# EAGLE board LED_ansteuerung (EAGLE 8.0.1)

Size 100 x 80 mm. Coordinates in mm from the lower left corner, seen from the top.
Outline: 0,0 100,0 100,80 0,80 0,0
Copper layers (1*16): Top 0.035mm / dielectric 1.5mm / Bottom 0.035mm
Design rules "default": minimum track width 10mil, minimum drill 24mil, track to track 8mil, track to pad 8mil, pad to pad 8mil, via to via 8mil, smd to smd 8mil, copper to edge 40mil, drill to drill 8mil, minimum pad ring 10mil, minimum via ring 8mil, stop-mask expansion 4mil, vias tented up to drill 0mil, thermal gap 10mil

## Footprints (pad centres in the part's own frame; a part is rotated, then mirrored left to right if it is on the bottom)
DIL16 = drill 0.813 long: 1 -8.89,-3.81; 2 -6.35,-3.81; 3 -3.81,-3.81; 4 -1.27,-3.81; 5 1.27,-3.81; 6 3.81,-3.81; 7 6.35,-3.81; 8 8.89,-3.81; 9 8.89,3.81; 10 6.35,3.81; 11 3.81,3.81; 12 1.27,3.81; 13 -1.27,3.81; 14 -3.81,3.81; 15 -6.35,3.81; 16 -8.89,3.81
SOT54A = drill 0.813 octagon: B 0,1.905; C -1.27,0; E 1.27,0
M1206 = smd 1.6 x 2: 1 -1.4,0; 2 1.4,0
1206 = smd 1.6 x 1.803: A -1.422,0; C 1.422,0

## Placement (x,y rotation side)
IC1  74595N  [DIL16]  8.89,50.8 90 top
IC2  74595N  [DIL16]  8.89,22.86 90 top
IC3  74595N  [DIL16]  26.67,73.66 0 top
IC4  74595N  [DIL16]  55.88,73.66 0 top
Q1  BC337  [SOT54A]  -85.09,41.91 0 top  (outside the outline)
Q2  BC337  [SOT54A]  -22.86,48.26 0 top  (outside the outline)
Q3  BC337  [SOT54A]  -35.56,48.26 0 top  (outside the outline)
Q4  BC337  [SOT54A]  -48.26,48.26 0 top  (outside the outline)
Q5  BC337  [SOT54A]  -60.96,48.26 0 top  (outside the outline)
Q6  BC337  [SOT54A]  -73.66,48.26 0 top  (outside the outline)
Q7  BC337  [SOT54A]  -86.36,48.26 0 top  (outside the outline)
Q8  BC337  [SOT54A]  -22.86,54.61 0 top  (outside the outline)
Q9  BC337  [SOT54A]  -35.56,54.61 0 top  (outside the outline)
Q10  BC337  [SOT54A]  -48.26,54.61 0 top  (outside the outline)
Q11  BC337  [SOT54A]  -60.96,54.61 0 top  (outside the outline)
R1  220  [M1206]  24.13,59.69 90 top
R2  220  [M1206]  29.21,59.69 90 top
R3  220  [M1206]  34.29,59.69 90 top
R4  220  [M1206]  39.37,59.69 90 top
R5  220  [M1206]  44.45,59.69 90 top
R6  220  [M1206]  49.53,59.69 90 top
R7  220  [M1206]  54.61,59.69 90 top
R8  220  [M1206]  59.69,59.69 90 top
R9  220  [M1206]  64.77,59.69 90 top
R10  220  [M1206]  69.85,59.69 90 top
R11  220  [M1206]  -15.24,41.91 0 top  (outside the outline)
R12  220  [M1206]  -20.32,41.91 0 top  (outside the outline)
V1  blue  [1206]  24.13,53.34 270 top
V2  blue  [1206]  29.21,53.34 270 top
V3  blue  [1206]  -36.83,41.91 0 top  (outside the outline)
V4  blue  [1206]  -41.91,41.91 0 top  (outside the outline)
V5  [1206]  -35.56,90.17 0 top  (outside the outline)
V6  blue  [1206]  -46.99,41.91 0 top  (outside the outline)
V7  blue  [1206]  -52.07,41.91 0 top  (outside the outline)
V8  blue  [1206]  -57.15,41.91 0 top  (outside the outline)
V9  blue  [1206]  -62.23,41.91 0 top  (outside the outline)
V10  blue  [1206]  -67.31,41.91 0 top  (outside the outline)
V11  blue  [1206]  -72.39,41.91 0 top  (outside the outline)
V12  blue  [1206]  -46.99,59.69 0 top  (outside the outline)
V13  blue  [1206]  -52.07,59.69 0 top  (outside the outline)
V14  blue  [1206]  -57.15,59.69 0 top  (outside the outline)
V15  blue  [1206]  -62.23,59.69 0 top  (outside the outline)
V16  blue  [1206]  -67.31,59.69 0 top  (outside the outline)
V17  blue  [1206]  -72.39,59.69 0 top  (outside the outline)
V18  [1206]  -77.47,59.69 0 top  (outside the outline)
V19  [1206]  -82.55,59.69 0 top  (outside the outline)
V20  [1206]  -87.63,59.69 0 top  (outside the outline)
V21  [1206]  -15.24,64.77 0 top  (outside the outline)
V22  [1206]  -20.32,64.77 0 top  (outside the outline)
V23  [1206]  -25.4,64.77 0 top  (outside the outline)
V24  [1206]  -30.48,64.77 0 top  (outside the outline)
V25  [1206]  -35.56,64.77 0 top  (outside the outline)
V26  [1206]  -40.64,64.77 0 top  (outside the outline)
V27  [1206]  -45.72,64.77 0 top  (outside the outline)
V28  [1206]  -50.8,64.77 0 top  (outside the outline)
V29  [1206]  -55.88,64.77 0 top  (outside the outline)
V30  [1206]  -60.96,64.77 0 top  (outside the outline)
V31  [1206]  -66.04,64.77 0 top  (outside the outline)
V32  [1206]  -71.12,64.77 0 top  (outside the outline)
V33  [1206]  -76.2,64.77 0 top  (outside the outline)
V34  [1206]  -81.28,64.77 0 top  (outside the outline)
V35  [1206]  -86.36,64.77 0 top  (outside the outline)
V36  [1206]  -15.24,69.85 0 top  (outside the outline)
V37  [1206]  -20.32,69.85 0 top  (outside the outline)
V38  [1206]  -25.4,69.85 0 top  (outside the outline)
V39  [1206]  -30.48,69.85 0 top  (outside the outline)
V40  [1206]  -35.56,69.85 0 top  (outside the outline)
V41  [1206]  -40.64,69.85 0 top  (outside the outline)
V42  [1206]  -45.72,69.85 0 top  (outside the outline)
V43  [1206]  -50.8,69.85 0 top  (outside the outline)
V44  [1206]  -55.88,69.85 0 top  (outside the outline)
V45  [1206]  -60.96,69.85 0 top  (outside the outline)
V46  [1206]  -66.04,69.85 0 top  (outside the outline)
V47  [1206]  -71.12,69.85 0 top  (outside the outline)
V48  [1206]  -76.2,69.85 0 top  (outside the outline)
V49  [1206]  -81.28,69.85 0 top  (outside the outline)
V50  [1206]  -86.36,69.85 0 top  (outside the outline)
V51  [1206]  -15.24,74.93 0 top  (outside the outline)
V52  [1206]  -20.32,74.93 0 top  (outside the outline)
V53  [1206]  -25.4,74.93 0 top  (outside the outline)
V54  [1206]  -30.48,74.93 0 top  (outside the outline)
V55  [1206]  -35.56,74.93 0 top  (outside the outline)
V56  [1206]  -40.64,74.93 0 top  (outside the outline)
V57  [1206]  -45.72,74.93 0 top  (outside the outline)
V58  [1206]  -50.8,74.93 0 top  (outside the outline)
V59  [1206]  -55.88,74.93 0 top  (outside the outline)
V60  [1206]  -60.96,74.93 0 top  (outside the outline)
V61  [1206]  -66.04,74.93 0 top  (outside the outline)
V62  [1206]  -71.12,74.93 0 top  (outside the outline)
V63  [1206]  -76.2,74.93 0 top  (outside the outline)
V64  [1206]  -81.28,74.93 0 top  (outside the outline)
V65  [1206]  -86.36,74.93 0 top  (outside the outline)
V66  [1206]  -15.24,80.01 0 top  (outside the outline)
V67  [1206]  -20.32,80.01 0 top  (outside the outline)
V68  [1206]  -25.4,80.01 0 top  (outside the outline)
V69  [1206]  -30.48,80.01 0 top  (outside the outline)
V70  [1206]  -35.56,80.01 0 top  (outside the outline)
V71  [1206]  -40.64,80.01 0 top  (outside the outline)
V72  [1206]  -45.72,80.01 0 top  (outside the outline)
V73  [1206]  -50.8,80.01 0 top  (outside the outline)
V74  [1206]  -55.88,80.01 0 top  (outside the outline)
V75  [1206]  -60.96,80.01 0 top  (outside the outline)
V76  [1206]  -66.04,80.01 0 top  (outside the outline)
V77  [1206]  -71.12,80.01 0 top  (outside the outline)
V78  [1206]  -76.2,80.01 0 top  (outside the outline)
V79  [1206]  -81.28,80.01 0 top  (outside the outline)
V80  [1206]  -86.36,80.01 0 top  (outside the outline)
V81  [1206]  -15.24,85.09 0 top  (outside the outline)
V82  [1206]  -20.32,85.09 0 top  (outside the outline)
V83  [1206]  -25.4,85.09 0 top  (outside the outline)
V84  [1206]  -30.48,85.09 0 top  (outside the outline)
V85  [1206]  -35.56,85.09 0 top  (outside the outline)
V86  [1206]  -40.64,85.09 0 top  (outside the outline)
V87  [1206]  -45.72,85.09 0 top  (outside the outline)
V88  [1206]  -50.8,85.09 0 top  (outside the outline)
V89  [1206]  -55.88,85.09 0 top  (outside the outline)
V90  [1206]  -60.96,85.09 0 top  (outside the outline)
V91  [1206]  -66.04,85.09 0 top  (outside the outline)
V92  [1206]  -71.12,85.09 0 top  (outside the outline)
V93  [1206]  -76.2,85.09 0 top  (outside the outline)
V94  [1206]  -81.28,85.09 0 top  (outside the outline)
V95  [1206]  -86.36,85.09 0 top  (outside the outline)
V96  [1206]  -15.24,90.17 0 top  (outside the outline)
V97  [1206]  -20.32,90.17 0 top  (outside the outline)
V98  [1206]  -25.4,90.17 0 top  (outside the outline)
V99  [1206]  -30.48,90.17 0 top  (outside the outline)
V100  blue  [1206]  -40.64,16.51 0 top  (outside the outline)
V101  [1206]  -67.31,53.34 0 top  (outside the outline)
V102  [1206]  -73.66,53.34 0 top  (outside the outline)
V103  [1206]  -80.01,53.34 0 top  (outside the outline)
V104  [1206]  -86.36,53.34 0 top  (outside the outline)
V105  [1206]  -16.51,59.69 0 top  (outside the outline)
V106  [1206]  -22.86,59.69 0 top  (outside the outline)
V107  [1206]  -29.21,59.69 0 top  (outside the outline)
V108  [1206]  -35.56,59.69 0 top  (outside the outline)
V109  blue  [1206]  -46.99,16.51 0 top  (outside the outline)
V110  blue  [1206]  -60.96,29.21 0 top  (outside the outline)
V111  blue  [1206]  -35.56,35.56 0 top  (outside the outline)
V112  blue  [1206]  -67.31,29.21 0 top  (outside the outline)
V113  blue  [1206]  -73.66,29.21 0 top  (outside the outline)
V114  blue  [1206]  -80.01,29.21 0 top  (outside the outline)
V115  blue  [1206]  -86.36,29.21 0 top  (outside the outline)
V116  [1206]  -41.91,59.69 0 top  (outside the outline)
V117  blue  [1206]  -16.51,35.56 0 top  (outside the outline)
V118  blue  [1206]  -22.86,35.56 0 top  (outside the outline)
V119  blue  [1206]  -29.21,35.56 0 top  (outside the outline)
V120  blue  [1206]  -53.34,16.51 0 top  (outside the outline)
V121  blue  [1206]  -59.69,16.51 0 top  (outside the outline)
V122  blue  [1206]  -66.04,16.51 0 top  (outside the outline)
V123  blue  [1206]  -72.39,16.51 0 top  (outside the outline)
V124  blue  [1206]  -78.74,16.51 0 top  (outside the outline)
V125  blue  [1206]  -85.09,16.51 0 top  (outside the outline)
V126  blue  [1206]  -16.51,29.21 0 top  (outside the outline)
V127  blue  [1206]  -22.86,29.21 0 top  (outside the outline)
V128  blue  [1206]  -29.21,29.21 0 top  (outside the outline)
V129  blue  [1206]  -35.56,29.21 0 top  (outside the outline)
V130  blue  [1206]  -41.91,29.21 0 top  (outside the outline)
V131  blue  [1206]  -48.26,29.21 0 top  (outside the outline)
V132  blue  [1206]  -54.61,29.21 0 top  (outside the outline)
V137  blue  [1206]  -91.44,-39.37 0 top  (outside the outline)
V138  blue  [1206]  -91.44,-13.97 0 top  (outside the outline)
V139  blue  [1206]  -85.09,-13.97 0 top  (outside the outline)
V140  blue  [1206]  -78.74,-13.97 0 top  (outside the outline)
V142  blue  [1206]  -85.09,-20.32 0 top  (outside the outline)
V143  blue  [1206]  -78.74,-20.32 0 top  (outside the outline)
V144  blue  [1206]  -91.44,-26.67 0 top  (outside the outline)
V145  blue  [1206]  -85.09,-26.67 0 top  (outside the outline)
V146  blue  [1206]  -78.74,-26.67 0 top  (outside the outline)
V147  blue  [1206]  -91.44,-33.02 0 top  (outside the outline)
V148  blue  [1206]  -85.09,-33.02 0 top  (outside the outline)
V149  blue  [1206]  -78.74,-33.02 0 top  (outside the outline)

## Library data of the parts
IC1-IC4 = 74ttl-din
Q1-Q11 = transistor-small-signal
R1-R12 = rcl
V1-V132 V137-V140 V142-V149 = led

## Nets
+5V: IC1.10 IC1.16 IC2.10 IC2.16 IC3.10 IC3.16 IC4.10 IC4.16
GND: IC1.8 IC1.13 IC2.3 IC2.4 IC2.5 IC2.6 IC2.7 IC2.8 IC2.9 IC2.13 IC3.8 IC3.13 IC4.4 IC4.5 IC4.6 IC4.7 IC4.8 IC4.9 IC4.13 Q1.E Q2.E Q3.E Q4.E Q5.E Q6.E Q7.E Q8.E Q9.E Q10.E Q11.E
N$1: Q1.C V1.C V2.C V3.C V4.C V5.C V6.C V7.C V8.C V9.C V10.C V11.C V12.C
N$2: Q2.C R1.1 V1.A V13.A V13.C V14.C V15.C V16.C V17.C V18.C V19.C V20.C V21.C V22.C V23.C V24.C V25.A V37.A V49.A V61.A V73.A V85.A V97.A V109.A V121.A V138.A
N$3: Q3.C V25.C V26.C V27.C V28.C V29.C V30.C V31.C V32.C V33.C V34.C V35.C V36.C
N$4: IC3.15 R1.2
N$5: IC3.1 R2.2
N$6: IC3.2 R3.2
N$7: IC3.3 R4.2
N$8: IC3.4 R5.2
N$9: IC3.5 R6.2
N$10: IC3.6 R7.2
N$11: IC3.7 R8.2
N$12: IC3.9 IC4.14
N$13: IC4.15 R9.2
N$14: IC4.1 R10.2
N$15: IC4.2 R11.2
N$16: Q4.C V37.C V38.C V39.C V40.C V41.C V42.C V43.C V44.C V45.C V46.C V47.C V48.C
N$17: Q5.C V49.C V50.C V51.C V52.C V53.C V54.C V55.C V56.C V57.C V58.C V59.C V60.C
N$18: Q6.C V61.C V62.C V63.C V64.C V65.C V66.C V67.C V68.C V69.C V70.C V71.C V72.C
N$19: Q8.C V85.C V86.C V87.C V88.C V89.C V90.C V91.C V92.C V93.C V94.C V95.C V96.C
N$20: Q9.C V97.C V98.C V99.C V100.C V101.C V102.C V103.C V104.C V105.C V106.C V107.C V108.C
N$21: IC4.3 R12.2
N$22: V109.C V110.C V111.C V112.C V113.C V114.C V115.C V116.C V117.C V118.C V119.C V120.C
N$23: Q10.C V121.C V122.C V123.C V124.C V125.C V126.C V127.C V128.C V129.C V130.C V131.C V132.C
N$24: R12.1 V12.A V24.A V36.A V48.A V60.A V72.A V84.A V96.A V108.A V120.A V132.A V149.A
N$25: Q7.C V73.C V74.C V75.C V76.C V77.C V78.C V79.C V80.C V81.C V82.C V83.C V84.C
N$26: R11.1 V11.A V23.A V35.A V47.A V59.A V71.A V83.A V95.A V107.A V119.A V131.A V148.A
N$27: R10.1 V10.A V22.A V34.A V46.A V58.A V70.A V82.A V94.A V106.A V118.A V130.A V147.A
N$28: R9.1 V9.A V21.A V33.A V45.A V57.A V69.A V81.A V93.A V105.A V117.A V129.A V146.A
N$29: R8.1 V8.A V20.A V32.A V44.A V56.A V68.A V80.A V92.A V104.A V116.A V128.A V145.A
N$30: R7.1 V7.A V19.A V31.A V43.A V55.A V67.A V79.A V91.A V103.A V115.A V127.A V144.A
N$31: R6.1 V6.A V18.A V30.A V42.A V54.A V66.A V78.A V90.A V102.A V114.A V126.A V143.A
N$32: R5.1 V5.A V17.A V29.A V41.A V53.A V65.A V77.A V89.A V101.A V113.A V125.A V142.A
N$33: R4.1 V4.A V16.A V28.A V40.A V52.A V64.A V76.A V88.A V100.A V112.A V124.A V137.A
N$34: R3.1 V3.A V15.A V27.A V39.A V51.A V63.A V75.A V87.A V99.A V111.A V123.A V140.A
N$35: R2.1 V2.A V14.A V26.A V38.A V50.A V62.A V74.A V86.A V98.A V110.A V122.A V139.A
N$36: Q11.C V137.C V138.C V139.C V140.C V142.C V143.C V144.C V145.C V146.C V147.C V148.C V149.C
N$37: IC1.15 Q1.B
N$38: IC1.1 Q2.B
N$39: IC1.2 Q3.B
N$40: IC1.3 Q4.B
N$41: IC1.4 Q5.B
N$42: IC1.5 Q6.B
N$43: IC1.6 Q7.B
N$44: IC1.7 Q8.B
N$45: IC1.9 IC2.14
N$46: IC2.15 Q9.B
N$47: IC2.1 Q10.B
N$48: IC2.2 Q11.B
RCLK: IC1.12 IC2.12 IC3.12 IC4.12
SERS: IC3.14
SERZ: IC1.14
SHIFTCLK: IC1.11 IC2.11 IC3.11 IC4.11

## Tracks (layer width: path | path; a pad name or v marks a point on that pad's centre or on a via)
+5V  (7 unrouted)
GND  (29 unrouted)
N$1  (12 unrouted)
N$2  (25 unrouted)
N$3  (12 unrouted)
N$4  (1 unrouted)
N$5  (1 unrouted)
N$6  (1 unrouted)
N$7  (1 unrouted)
N$8  (1 unrouted)
N$9  (1 unrouted)
N$10  (1 unrouted)
N$11  (1 unrouted)
N$12  (1 unrouted)
N$13  (1 unrouted)
N$14  (1 unrouted)
N$15  (1 unrouted)
N$16  (12 unrouted)
N$17  (12 unrouted)
N$18  (12 unrouted)
N$19  (12 unrouted)
N$20  (12 unrouted)
N$21  (1 unrouted)
N$22  (11 unrouted)
N$23  (12 unrouted)
N$24  (12 unrouted)
N$25  (12 unrouted)
N$26  (12 unrouted)
N$27  (12 unrouted)
N$28  (12 unrouted)
N$29  (12 unrouted)
N$30  (12 unrouted)
N$31  (12 unrouted)
N$32  (12 unrouted)
N$33  (12 unrouted)
N$34  (12 unrouted)
N$35  (12 unrouted)
N$36  (12 unrouted)
N$37  (1 unrouted)
N$38  (1 unrouted)
N$39  (1 unrouted)
N$40  (1 unrouted)
N$41  (1 unrouted)
N$42  (1 unrouted)
N$43  (1 unrouted)
N$44  (1 unrouted)
N$45  (1 unrouted)
N$46  (1 unrouted)
N$47  (1 unrouted)
N$48  (1 unrouted)
RCLK  (3 unrouted)
SHIFTCLK  (3 unrouted)